# Altium PCB IOT_IO_v0.PcbDoc (part 3 of 3)
Units mil, origin at the board's own origin, x right, y up, seen from the top; angles counter-clockwise.
Board outline 8196.85 x 3393.7 mil, 2 copper layers (Top Layer, Top, Bottom Layer, Bottom); 364 components, 308 nets, 1129 pads, 291 vias.
Unrouted connection lines stored in the file: 7.
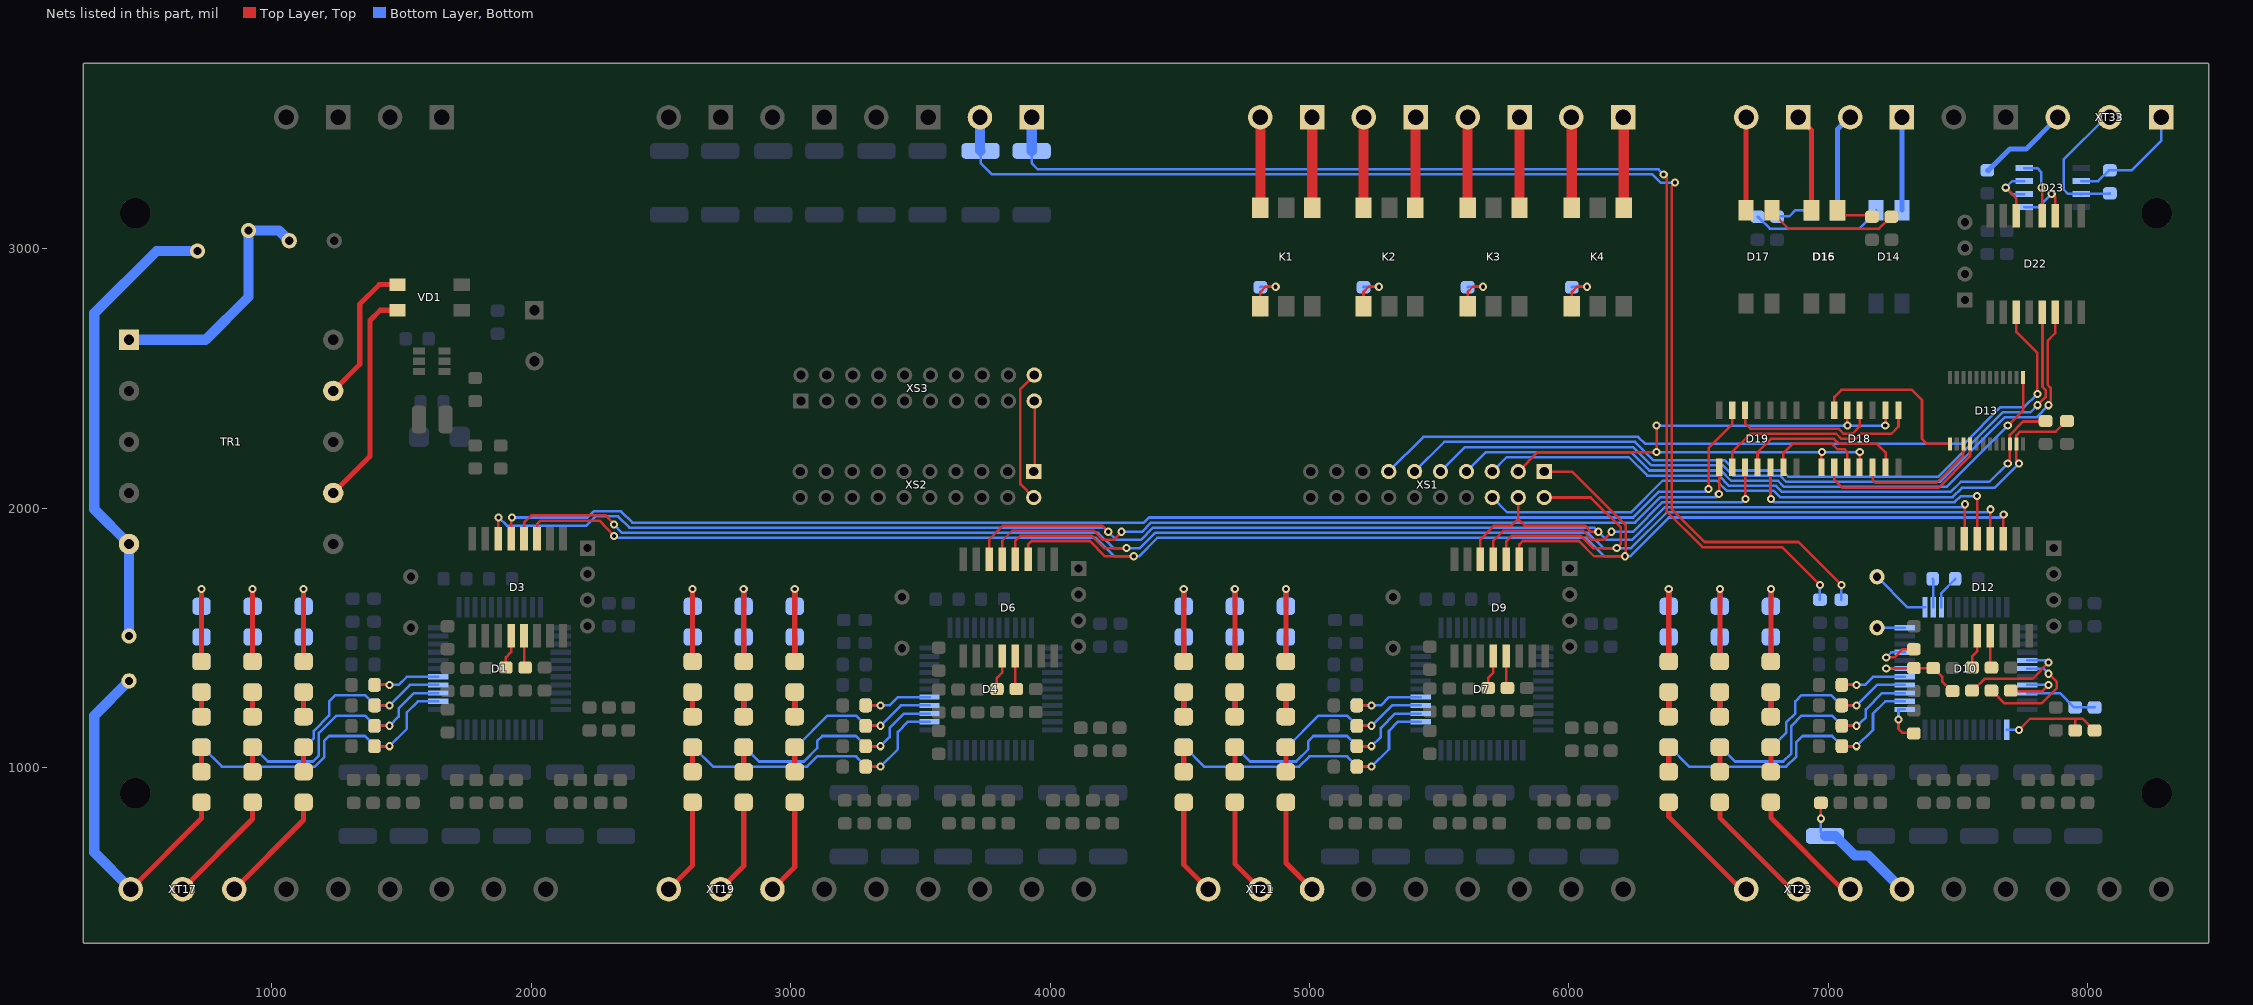
[diagram p3: the nets of this part, all layers, seen from the top]

## Via types
v1: diameter 31.5, hole 15.75, Top Layer, Top to Bottom Layer, Bottom, 291 vias

## Nets (pads, with @x,y where several pads share a name; then routed paths per layer and width w, separated by ;. In a path a pad name is that pad's centre, name@x,y a point inside that pad or via, vN(x,y) a via of type N, cw(c..) or ccw(c..) an arc to the next point about the centre after c; other vN are vias at no path point) (continued)
NET00082: R82.1 R90.2 XT15.1 | length 516.1
  Top Layer, Top w9.84: v1(6972.44,803.15) R90.2@6972.44,864.17
  Bottom Layer, Bottom w9.84: v1(6972.44,803.15) 6972.44,751.97 R82.1@6988.19,736.22
  Bottom Layer, Bottom w39.37: R82.1@6988.19,736.22 7027.56,736.22 7102.36,661.42 7155.12,661.42 XT15.1@7285.04,531.5
NET00083: BQ4.2 D10.22 | length 106.3
  Bottom Layer, Bottom w9.84: BQ4.2@7188.98,1539.37 D10.22@7295.28,1539.37
NET00084: D10.19 R94.1 | length 198.4
  Top Layer, Top w9.84: v1(7224.41,1425.2) 7255.91,1425.2 7287.4,1456.69 R94.1@7330.71,1456.69
  Bottom Layer, Bottom w9.84: v1(7224.41,1425.2) 7244.09,1444.88 D10.19@7295.28,1444.88
NET00085: BQ4.1 D10.23 | length 234
  Bottom Layer, Bottom w9.84: BQ4.1@7188.98,1736.22 7307.09,1618.11 D10.23@7374.02,1618.11
NET00086: D10.25 R99.2 | length 131.9
  Bottom Layer, Bottom w9.84: D10.25@7437.01,1618.11 7437.01,1673.23 7488.19,1724.41 R99.2@7490.16,1728.35
NET00087: D10.24 R100.2 | length 110.7
  Bottom Layer, Bottom w9.84: R100.2@7403.54,1728.35 7405.51,1724.41 D10.24@7405.51,1618.11
NET00088: D10.41 R96.2 | length 238.9
  Top Layer, Top w9.84: R96.2@7704.72,1297.24 7706.69,1295.28 7826.77,1295.28 v1(7850.39,1318.9)
  Bottom Layer, Bottom w9.84: D10.41@7767.72,1318.9 v1(7850.39,1318.9)
NET00089: D10.39 R97.2 | length 455.8
  Top Layer, Top w9.84: R97.2@7629.92,1297.24 7631.89,1295.28 7633.86,1295.28 7681.1,1248.03 7822.83,1248.03 7881.89,1307.09 7881.89,1330.71 v1(7850.39,1362.2)
  Bottom Layer, Bottom w9.84: D10.39@7767.72,1381.89 7830.71,1381.89 v1(7850.39,1362.2)
NET00090: D10.38 R98.2 | length 426.1
  Top Layer, Top w9.84: R98.2@7555.12,1297.24 7557.09,1299.21 7559.06,1299.21 7602.36,1342.52 7787.4,1342.52 v1(7850.39,1405.51)
  Bottom Layer, Bottom w9.84: D10.38@7767.72,1413.39 7842.52,1413.39 v1(7850.39,1405.51)
NET00091: C63.2 D10.12 | length 164.8
  Top Layer, Top w9.84: v1(7271.65,1185.04) 7271.65,1149.61 7287.4,1133.86 7328.74,1133.86 C63.2@7330.71,1131.89
  Bottom Layer, Bottom w9.84: v1(7271.65,1185.04) 7271.65,1224.41 D10.12@7295.28,1224.41
NET00092: R84.1 R92.2 XT16.1 | length 4701.6
  Top Layer, Top w9.84: v1(6366.14,3287.4) 6377.95,3275.59 6377.95,1988.19 6515.75,1850.39 6822.83,1850.39 v1(6968.5,1704.72)
  Bottom Layer, Bottom w9.84: R84.1@3929.13,3377.95 3929.13,3330.71 3952.76,3307.09 6346.46,3307.09 v1(6366.14,3287.4) ; R92.2@6968.5,1647.64 v1(6968.5,1704.72)
  Bottom Layer, Bottom w39.37: R84.1@3929.13,3377.95 3929.92,3378.74 XT16.1@3929.92,3507.87
NET00093: R85.1 R93.2 XT16.2 | length 4982.3
  Top Layer, Top w9.84: v1(6409.45,3255.91) 6397.64,3244.09 6397.64,1996.06 6523.62,1870.08 6885.83,1870.08 v1(7051.18,1704.72)
  Bottom Layer, Bottom w9.84: R85.1@3732.28,3377.95 3732.28,3330.71 3775.59,3287.4 6322.83,3287.4 6354.33,3255.91 v1(6409.45,3255.91) ; R93.2@7051.18,1647.64 v1(7051.18,1704.72)
  Bottom Layer, Bottom w39.37: XT16.2@3729.92,3507.87 3729.92,3380.32 R85.1@3732.28,3377.95
NET00094: C61.2 C62.2 D10.1 | length 420.6
  Top Layer, Top w9.84: v1(7736.22,1145.67) 7779.53,1188.98 7952.76,1188.98 ; C61.2@7952.76,1143.7 7952.76,1188.98 ; C62.2@8027.56,1143.7 8025.59,1145.67 8023.62,1145.67 7980.31,1188.98 7952.76,1188.98
  Bottom Layer, Bottom w9.84: D10.1@7688.98,1145.67 v1(7736.22,1145.67)
NET00095: C65.1 D10.42 R95.1 | length 282.7
  Bottom Layer, Bottom w9.84: D10.42@7767.72,1287.4 7893.7,1287.4 7948.82,1232.28 R95.1@7952.76,1232.28 C65.1@8027.56,1232.28
NET00096: C52.2 D10.17 R76.1 R77.2 | length 396.2
  Top Layer, Top w9.84: v1(7224.41,1381.89) 7214.57,1383.86 C52.2@7330.71,1383.86 7399.61,1383.86 7401.57,1381.89 R77.2@7405.51,1383.86 7407.48,1383.86 7440.94,1350.39 7440.94,1330.71 7476.38,1295.28 R76.1@7480.31,1295.28
  Bottom Layer, Bottom w9.84: v1(7224.41,1381.89) D10.17@7295.28,1381.89
NET00097: XS2.1 XS3.19 | length 273.6
  Top Layer, Top w9.84: XS2.1@3937.01,2141.73 3940.94,2145.67 3940.94,2409.45 XS3.19@3939.37,2413.39
NET00098: XS2.2 XS3.20 | length 515
  Top Layer, Top w9.84: XS2.2@3937.01,2041.73 3885.83,2092.91 3885.83,2459.84 XS3.20@3939.37,2513.39
NET00121: R101.2 R107.1 | length 94.5
  Top Layer, Top w19.68: R101.2@728.35,984.25 R107.1@728.35,1078.74
NET00122: R107.2 R113.1 | length 94.5
  Top Layer, Top w19.68: R107.2@728.35,1196.85 R113.1@728.35,1291.34
NET00123: R113.2 R119.2 | length 346.5
  Top Layer, Top w19.68: R113.2@728.35,1409.45 v1(728.35,1688.98)
  Bottom Layer, Bottom w19.68: R119.2@728.35,1622.05 v1(728.35,1688.98)
NET00124: R119.1 R125.2 | length 94.5
  Bottom Layer, Bottom w19.68: R125.2@728.35,1409.45 R119.1@728.35,1503.94
NET00125: R125.1 R131.2 | length 94.5
  Bottom Layer, Bottom w19.68: R131.2@728.35,1196.85 R125.1@728.35,1291.34
NET00128: R102.2 R108.1 | length 94.5
  Top Layer, Top w19.68: R102.2@925.2,984.25 R108.1@925.2,1078.74
NET00129: R108.2 R114.1 | length 94.5
  Top Layer, Top w19.68: R108.2@925.2,1196.85 R114.1@925.2,1291.34
NET00130: R114.2 R120.2 | length 346.5
  Top Layer, Top w19.68: R114.2@925.2,1409.45 v1(925.2,1688.98)
  Bottom Layer, Bottom w19.68: R120.2@925.2,1622.05 v1(925.2,1688.98)
NET00131: R120.1 R126.2 | length 94.5
  Bottom Layer, Bottom w19.68: R126.2@925.2,1409.45 R120.1@925.2,1503.94
NET00132: R126.1 R132.2 | length 94.5
  Bottom Layer, Bottom w19.68: R132.2@925.2,1196.85 R126.1@925.2,1291.34
NET00134: R103.2 R109.1 | length 94.5
  Top Layer, Top w19.68: R103.2@1122.05,984.25 R109.1@1122.05,1078.74
NET00135: R109.2 R115.1 | length 94.5
  Top Layer, Top w19.68: R109.2@1122.05,1196.85 R115.1@1122.05,1291.34
NET00136: R115.2 R121.2 | length 346.5
  Top Layer, Top w19.68: R115.2@1122.05,1409.45 v1(1122.05,1688.98)
  Bottom Layer, Bottom w19.68: R121.2@1122.05,1622.05 v1(1122.05,1688.98)
NET00137: R121.1 R127.2 | length 94.5
  Bottom Layer, Bottom w19.68: R127.2@1122.05,1409.45 R121.1@1122.05,1503.94
NET00138: R127.1 R133.2 | length 94.5
  Bottom Layer, Bottom w19.68: R133.2@1122.05,1196.85 R127.1@1122.05,1291.34
NET00140: R102.1 XT17.2 | length 446.5
  Top Layer, Top w19.68: XT17.2@655.12,531.5 925.2,801.57 R102.1@925.2,866.14
NET00142: R103.1 XT17.3 | length 445.2
  Top Layer, Top w19.68: XT17.3@855.12,531.5 1122.05,798.43 R103.1@1122.05,866.14
NET00143: R104.2 R110.1 | length 94.5
  Top Layer, Top w19.68: R104.2@2622.05,984.25 R110.1@2622.05,1078.74
NET00144: R110.2 R116.1 | length 94.5
  Top Layer, Top w19.68: R110.2@2622.05,1196.85 R116.1@2622.05,1291.34
NET00145: R116.2 R122.2 | length 346.5
  Top Layer, Top w19.68: R116.2@2622.05,1409.45 v1(2622.05,1688.98)
  Bottom Layer, Bottom w19.68: R122.2@2622.05,1622.05 v1(2622.05,1688.98)
NET00146: R122.1 R128.2 | length 94.5
  Bottom Layer, Bottom w19.68: R128.2@2622.05,1409.45 R122.1@2622.05,1503.94
NET00147: R128.1 R134.2 | length 94.5
  Bottom Layer, Bottom w19.68: R134.2@2622.05,1196.85 R128.1@2622.05,1291.34
NET00148: R105.2 R111.1 | length 94.5
  Top Layer, Top w19.68: R105.2@2818.9,984.25 R111.1@2818.9,1078.74
NET00150: R111.2 R117.1 | length 94.5
  Top Layer, Top w19.68: R111.2@2818.9,1196.85 R117.1@2818.9,1291.34
NET00151: R117.2 R123.2 | length 346.5
  Top Layer, Top w19.68: R117.2@2818.9,1409.45 v1(2818.9,1688.98)
  Bottom Layer, Bottom w19.68: R123.2@2818.9,1622.05 v1(2818.9,1688.98)
NET00152: R123.1 R129.2 | length 94.5
  Bottom Layer, Bottom w19.68: R129.2@2818.9,1409.45 R123.1@2818.9,1503.94
NET00153: R129.1 R135.2 | length 94.5
  Bottom Layer, Bottom w19.68: R135.2@2818.9,1196.85 R129.1@2818.9,1291.34
NET00155: R106.2 R112.1 | length 94.5
  Top Layer, Top w19.68: R106.2@3015.75,984.25 R112.1@3015.75,1078.74
NET00156: R112.2 R118.1 | length 94.5
  Top Layer, Top w19.68: R112.2@3015.75,1196.85 R118.1@3015.75,1291.34
NET00157: R118.2 R124.2 | length 346.5
  Top Layer, Top w19.68: R118.2@3015.75,1409.45 v1(3015.75,1688.98)
  Bottom Layer, Bottom w19.68: R124.2@3015.75,1622.05 v1(3015.75,1688.98)
NET00158: R124.1 R130.2 | length 94.5
  Bottom Layer, Bottom w19.68: R130.2@3015.75,1409.45 R124.1@3015.75,1503.94
NET00159: R130.1 R136.2 | length 94.5
  Bottom Layer, Bottom w19.68: R136.2@3015.75,1196.85 R130.1@3015.75,1291.34
NET00161: R105.1 XT19.2 | length 371.5
  Top Layer, Top w19.68: XT19.2@2729.92,531.5 2818.9,620.47 R105.1@2818.9,866.14
NET00162: R104.1 XT19.1 | length 372.8
  Top Layer, Top w19.68: XT19.1@2529.92,531.5 2622.05,623.62 R104.1@2622.05,866.14
NET00163: R106.1 XT19.3 | length 370.2
  Top Layer, Top w19.68: XT19.3@2929.92,531.5 3015.75,617.32 R106.1@3015.75,866.14
NET00176: R145.2 R151.1 | length 94.5
  Top Layer, Top w19.68: R145.2@4515.75,984.25 R151.1@4515.75,1078.74
NET00177: R151.2 R157.1 | length 94.5
  Top Layer, Top w19.68: R151.2@4515.75,1196.85 R157.1@4515.75,1291.34
NET00178: R157.2 R163.2 | length 346.5
  Top Layer, Top w19.68: R157.2@4515.75,1409.45 v1(4515.75,1688.98)
  Bottom Layer, Bottom w19.68: R163.2@4515.75,1622.05 v1(4515.75,1688.98)
NET00179: R163.1 R169.2 | length 94.5
  Bottom Layer, Bottom w19.68: R169.2@4515.75,1409.45 R163.1@4515.75,1503.94
NET00180: R169.1 R175.2 | length 94.5
  Bottom Layer, Bottom w19.68: R175.2@4515.75,1196.85 R169.1@4515.75,1291.34
NET00181: R146.2 R152.1 | length 94.5
  Top Layer, Top w19.68: R146.2@4712.6,984.25 R152.1@4712.6,1078.74
NET00182: R152.2 R158.1 | length 94.5
  Top Layer, Top w19.68: R152.2@4712.6,1196.85 R158.1@4712.6,1291.34
NET00183: R158.2 R164.2 | length 346.5
  Top Layer, Top w19.68: R158.2@4712.6,1409.45 v1(4712.6,1688.98)
  Bottom Layer, Bottom w19.68: R164.2@4712.6,1622.05 v1(4712.6,1688.98)
NET00184: R164.1 R170.2 | length 94.5
  Bottom Layer, Bottom w19.68: R170.2@4712.6,1409.45 R164.1@4712.6,1503.94
NET00185: R170.1 R176.2 | length 94.5
  Bottom Layer, Bottom w19.68: R176.2@4712.6,1196.85 R170.1@4712.6,1291.34
NET00186: R147.2 R153.1 | length 94.5
  Top Layer, Top w19.68: R147.2@4909.45,984.25 R153.1@4909.45,1078.74
NET00187: R153.2 R159.1 | length 94.5
  Top Layer, Top w19.68: R153.2@4909.45,1196.85 R159.1@4909.45,1291.34
NET00188: R159.2 R165.2 | length 346.5
  Top Layer, Top w19.68: R159.2@4909.45,1409.45 v1(4909.45,1688.98)
  Bottom Layer, Bottom w19.68: R165.2@4909.45,1622.05 v1(4909.45,1688.98)
NET00189: R165.1 R171.2 | length 94.5
  Bottom Layer, Bottom w19.68: R171.2@4909.45,1409.45 R165.1@4909.45,1503.94
NET00190: R171.1 R177.2 | length 94.5
  Bottom Layer, Bottom w19.68: R177.2@4909.45,1196.85 R171.1@4909.45,1291.34
NET00191: R146.1 XT21.2 | length 375.1
  Top Layer, Top w19.68: R146.1@4712.6,866.14 4712.6,629.13 XT21.2@4810.24,531.5
NET00192: R145.1 XT21.1 | length 373.8
  Top Layer, Top w19.68: R145.1@4515.75,866.14 4515.75,625.98 XT21.1@4610.24,531.5
NET00193: R147.1 XT21.3 | length 376.4
  Top Layer, Top w19.68: R147.1@4909.45,866.14 4909.45,632.28 XT21.3@5010.24,531.5
NET00198: R148.2 R154.1 | length 94.5
  Top Layer, Top w19.68: R148.2@6385.83,984.25 R154.1@6385.83,1078.74
NET00199: R154.2 R160.1 | length 94.5
  Top Layer, Top w19.68: R154.2@6385.83,1196.85 R160.1@6385.83,1291.34
NET00200: R160.2 R166.2 | length 346.5
  Top Layer, Top w19.68: R160.2@6385.83,1409.45 v1(6385.83,1688.98)
  Bottom Layer, Bottom w19.68: R166.2@6385.83,1622.05 v1(6385.83,1688.98)
NET00201: R166.1 R172.2 | length 94.5
  Bottom Layer, Bottom w19.68: R172.2@6385.83,1409.45 R166.1@6385.83,1503.94
NET00202: R172.1 R178.2 | length 94.5
  Bottom Layer, Bottom w19.68: R178.2@6385.83,1196.85 R172.1@6385.83,1291.34
NET00203: R149.2 R155.1 | length 94.5
  Top Layer, Top w19.68: R149.2@6582.68,984.25 R155.1@6582.68,1078.74
NET00204: R155.2 R161.1 | length 94.5
  Top Layer, Top w19.68: R155.2@6582.68,1196.85 R161.1@6582.68,1291.34
NET00205: R161.2 R167.2 | length 346.5
  Top Layer, Top w19.68: R161.2@6582.68,1409.45 v1(6582.68,1688.98)
  Bottom Layer, Bottom w19.68: R167.2@6582.68,1622.05 v1(6582.68,1688.98)
NET00206: R167.1 R173.2 | length 94.5
  Bottom Layer, Bottom w19.68: R173.2@6582.68,1409.45 R167.1@6582.68,1503.94
NET00207: R173.1 R179.2 | length 94.5
  Bottom Layer, Bottom w19.68: R179.2@6582.68,1196.85 R173.1@6582.68,1291.34
NET00208: R150.2 R156.1 | length 94.5
  Top Layer, Top w19.68: R150.2@6779.53,984.25 R156.1@6779.53,1078.74
NET00209: R156.2 R162.1 | length 94.5
  Top Layer, Top w19.68: R156.2@6779.53,1196.85 R162.1@6779.53,1291.34
NET00210: R162.2 R168.2 | length 346.5
  Top Layer, Top w19.68: R162.2@6779.53,1409.45 v1(6779.53,1688.98)
  Bottom Layer, Bottom w19.68: R168.2@6779.53,1622.05 v1(6779.53,1688.98)
NET00211: R168.1 R174.2 | length 94.5
  Bottom Layer, Bottom w19.68: R174.2@6779.53,1409.45 R168.1@6779.53,1503.94
NET00212: R174.1 R180.2 | length 94.5
  Bottom Layer, Bottom w19.68: R180.2@6779.53,1196.85 R174.1@6779.53,1291.34
NET00213: R149.1 XT23.2 | length 475.6
  Top Layer, Top w19.68: R149.1@6582.68,866.14 6582.68,807.09 6858.27,531.5 XT23.2@6885.04,531.5
NET00214: R148.1 XT23.1 | length 470.1
  Top Layer, Top w19.68: R148.1@6385.83,866.14 6385.83,811.02 6665.35,531.5 XT23.1@6685.04,531.5
NET00215: R150.1 XT23.3 | length 478.7
  Top Layer, Top w19.68: R150.1@6779.53,866.14 6779.53,807.09 7055.12,531.5 XT23.3@7085.04,531.5
NET00232: D22.14 D23.2 D23.3 | length 287.1
  Top Layer, Top w9.84: v1(7685.04,3236.22) 7725.98,3195.28 D22.14@7725.98,3128.54
  Bottom Layer, Bottom w9.84: D23.2@7755.91,3211.42 7709.84,3211.42 v1(7685.04,3236.22) 7710.24,3261.42 D23.3@7755.91,3261.42
NET00233: D22.12 D23.4 | length 241.7
  Top Layer, Top w9.84: v1(7822.83,3236.22) 7825.98,3233.07 D22.12@7825.98,3128.54
  Bottom Layer, Bottom w9.84: D23.4@7755.91,3311.42 7806.69,3311.42 7822.83,3295.28 v1(7822.83,3236.22)
NET00234: D22.11 D23.1 | length 217.3
  Top Layer, Top w9.84: v1(7862.2,3212.6) 7875.98,3198.82 D22.11@7875.98,3128.54
  Bottom Layer, Bottom w9.84: D23.1@7755.91,3161.42 7811.02,3161.42 v1(7862.2,3212.6)
NET00237: R201.1 XT33.3 | length 355.9
  Bottom Layer, Bottom w19.68: R201.1@7614.17,3303.15 7618.11,3303.15 7700.79,3385.83 7763.78,3385.83 7874.02,3496.06 XT33.3@7885.04,3507.87
NET00238: D23.6 R202.1 XT33.1 | length 463.7
  Bottom Layer, Bottom w9.84: D23.6@7975.59,3261.42 8040.94,3261.42 8082.68,3303.15 R202.1@8086.61,3303.15 8169.29,3303.15 8285.04,3418.9 XT33.1@8285.04,3507.87
NET00239: D23.7 R202.2 XT33.2 | length 546.7
  Bottom Layer, Bottom w9.84: D23.7@7975.59,3211.42 D23.7@7976.77,3212.6 ; XT33.2@8085.04,3507.87 8070.87,3507.87 7909.45,3346.46 7909.45,3228.35 7925.2,3212.6 D23.7@7976.77,3212.6 ; R202.2@8086.61,3214.57 8084.65,3212.6 D23.7@7976.77,3212.6
NET00241: D13.16 D18.9 | length 682.3
  Top Layer, Top w9.84: D18.9@7024.02,2158.27 7024.02,2109.84 7055.12,2078.74 7425.2,2078.74 7547.24,2200.79 D13.16@7547.24,2248.03
NET00242: D13.15 D18.12 | length 492.8
  Top Layer, Top w9.84: D18.12@7171.65,2158.27 7171.65,2107.87 7181.1,2098.43 7417.32,2098.43 7521.65,2202.76 D13.15@7521.65,2248.03
NET00244: D13.13 D18.6 | length 683.4
  Top Layer, Top w9.84: D18.6@7024.02,2377.95 7024.02,2429.53 7051.18,2456.69 7322.83,2456.69 7362.2,2417.32 7362.2,2267.72 7381.89,2248.03 D13.13@7470.47,2248.03
NET00246: D18.4 D19.5 | length 583
  Top Layer, Top w9.84: D19.5@6680.31,2377.95 6680.31,2327.56 6700.79,2307.09 7039.37,2307.09 7059.06,2287.4 7094.49,2287.4 7121.65,2314.57 D18.4@7121.65,2377.95
NET00247: D18.1 D19.9 | length 819.9
  Top Layer, Top w9.84: D19.9@6630.31,2158.27 6630.31,2216.93 6700.79,2287.4 7031.5,2287.4 7051.18,2267.72 7106.3,2267.72 7125.98,2287.4 7244.09,2287.4 7271.65,2314.96 D18.1@7271.65,2377.95
NET00248: D18.13 D19.11 | length 651.7
  Top Layer, Top w9.84: D19.11@6727.95,2158.27 6727.95,2216.14 6779.53,2267.72 7023.62,2267.72 7043.31,2248.03 7188.98,2248.03 7221.65,2215.35 D18.13@7221.65,2158.27
NET00249: D18.10 D19.13 | length 387.5
  Top Layer, Top w9.84: D19.13@6827.95,2158.27 6827.95,2213.78 6862.2,2248.03 7015.75,2248.03 7035.43,2228.35 7062.99,2228.35 7074.02,2217.32 D18.10@7074.02,2158.27
NET00250: K3.4 XT31.1 | length 349.5
  Top Layer, Top w39.37: K3.4@5810.24,3159.53 5810.24,3507.09 5811.02,3507.87 XT31.1@5810.24,3507.87
NET00251: K3.6 XT31.2 | length 348.3
  Top Layer, Top w39.37: K3.6@5610.24,3159.53 XT31.2@5610.24,3507.87
NET00252: K4.4 XT32.1 | length 351
  Top Layer, Top w39.37: XT32.1@6210.24,3507.87 6212.6,3507.87 6211.81,3507.09 K4.4@6211.81,3159.53
NET00253: K4.6 XT32.2 | length 348.6
  Top Layer, Top w39.37: XT32.2@6010.24,3507.87 6011.81,3503.94 K4.6@6011.81,3159.53
NET00254: K3.1 R199.2 | length 182.2
  Top Layer, Top w9.84: K3.1@5610.24,2779.53 5610.24,2834.65 5629.92,2854.33 v1(5669.29,2854.33)
  Bottom Layer, Bottom w9.84: R199.2@5610.24,2852.36 5612.2,2854.33 v1(5669.29,2854.33)
NET00255: K4.1 R200.2 | length 182.2
  Top Layer, Top w9.84: K4.1@6011.81,2779.53 6011.81,2834.65 6031.5,2854.33 v1(6070.87,2854.33)
  Bottom Layer, Bottom w9.84: R200.2@6011.81,2852.36 6013.78,2854.33 v1(6070.87,2854.33)
NET00256: K1.4 XT29.1 | length 349
  Top Layer, Top w39.37: XT29.1@5010.24,3507.87 5011.81,3503.94 5011.02,3503.15 K1.4@5011.02,3159.53
NET00257: K1.6 XT29.2 | length 349.1
  Top Layer, Top w39.37: XT29.2@4810.24,3507.87 4811.02,3507.87 K1.6@4811.02,3159.53
NET00258: K2.4 XT30.1 | length 349.5
  Top Layer, Top w39.37: K2.4@5408.66,3159.53 5408.66,3507.09 5409.45,3507.87 XT30.1@5410.24,3507.87
NET00259: K2.6 XT30.2 | length 349.9
  Top Layer, Top w39.37: K2.6@5208.66,3159.53 5208.66,3507.87 XT30.2@5210.24,3507.87
NET00260: K1.1 R197.2 | length 182.2
  Top Layer, Top w9.84: K1.1@4811.02,2779.53 4811.02,2834.65 4830.71,2854.33 v1(4870.08,2854.33)
  Bottom Layer, Bottom w9.84: R197.2@4811.02,2852.36 4812.99,2854.33 v1(4870.08,2854.33)
NET00261: K2.1 R198.2 | length 182.2
  Top Layer, Top w9.84: K2.1@5208.66,2779.53 5208.66,2834.65 5228.35,2854.33 v1(5267.72,2854.33)
  Bottom Layer, Bottom w9.84: R198.2@5208.66,2852.36 5210.63,2854.33 v1(5267.72,2854.33)
NET00262: TR1.9 VD1.3 | length 553.7
  Top Layer, Top w19.68: TR1.9@1236.22,2452.76 1338.58,2555.12 1338.58,2787.4 1413.39,2862.2 VD1.3@1484.25,2862.2
NET00263: TR1.7 VD1.4 | length 846.7
  Top Layer, Top w19.68: TR1.7@1236.22,2059.06 1377.95,2200.79 1377.95,2724.41 1417.32,2763.78 VD1.4@1484.25,2763.78
NET00267: FU2.2 TR1.5 VS1.2 | length 1796.7
  Bottom Layer, Bottom w39.37: FU2.2@448.82,1507.87 TR1.5@448.82,1862.2 314.96,1996.06 314.96,2751.97 555.12,2992.13 VS1.2@712.6,2992.13
NET00269: D14.2 XT26.1 | length 359.2
  Bottom Layer, Bottom w19.68: D14.2@7285.04,3149.61 7285.04,3502.36 7283.46,3503.94 XT26.1@7285.04,3507.87
NET00270: D14.1 R190.2 | length 509.4
  Bottom Layer, Bottom w9.84: R190.2@6728.35,3124.02 6730.31,3122.05 6732.28,3122.05 6775.59,3078.74 7122.05,3078.74 7185.04,3141.73 D14.1@7185.04,3149.61
NET00272: D15.1 R191.2 | length 144.5
  Bottom Layer, Bottom w9.84: R191.2@6803.15,3124.02 6805.12,3125.98 6850.39,3125.98 6874.02,3149.61 D15.1@6937.01,3149.61
NET00273: D15.2 XT26.2 | length 378.9
  Bottom Layer, Bottom w19.68: D15.2@7037.01,3149.61 7037.01,3462.2 7070.87,3496.06 XT26.2@7085.04,3507.87
NET00275: D16.1 R192.2 | length 156
  Top Layer, Top w9.84: D16.1@7035.43,3149.61 7035.43,3129.92 7163.39,3129.92 R192.2@7169.29,3124.02
NET00276: D17.1 R193.2 | length 513.3
  Top Layer, Top w9.84: D17.1@6783.46,3149.61 6783.46,3141.73 6846.46,3078.74 7196.85,3078.74 7240.16,3122.05 7242.13,3122.05 R193.2@7244.09,3124.02
NET00277: D16.2 XT27.1 | length 379.4
  Top Layer, Top w19.68: XT27.1@6885.04,3507.87 6893.7,3500 6935.43,3458.27 D16.2@6935.43,3149.61
NET00278: D17.2 XT27.2 | length 358.9
  Top Layer, Top w19.68: D17.2@6683.46,3149.61 6683.46,3506.3 XT27.2@6685.04,3507.87
NPOWER: FU1.2 TR1.1 VS1.1 | length 958.8
  Bottom Layer, Bottom w39.37: TR1.1@448.82,2649.61 744.09,2649.61 909.45,2814.96 VS1.1@909.45,3070.87 1027.56,3070.87 FU1.2@1066.93,3031.5
SCL1: D13.22 R189.2 XS1.5 | length 2384.3
  Top Layer, Top w9.84: v1(7692.91,2173.23) 7700.79,2181.1 D13.22@7700.79,2248.03 7700.79,2283.46 7751.97,2334.65 7834.65,2334.65 R189.2@7838.58,2336.61
  Bottom Layer, Bottom w9.84: XS1.5@5705.51,2141.73 5760.63,2196.85 6232.28,2196.85 6303.15,2125.98 6578.74,2125.98 6618.11,2086.61 6799.21,2086.61 6822.83,2062.99 7472.44,2062.99 7511.81,2102.36 7622.05,2102.36 v1(7692.91,2173.23)
SDA1: D13.23 R194.2 XS1.6 | length 2515
  Top Layer, Top w9.84: v1(7736.22,2173.23) 7726.38,2183.07 7726.38,2281.5 7740.16,2295.28 7877.95,2295.28 7917.32,2334.65 7919.29,2334.65 R194.2@7921.26,2336.61
  Bottom Layer, Bottom w9.84: XS1.6@5705.51,2041.73 5762.99,1984.25 6240.16,1984.25 6362.2,2106.3 6570.87,2106.3 6610.24,2066.93 6791.34,2066.93 6814.96,2043.31 7480.31,2043.31 7515.75,2078.74 7641.73,2078.74 v1(7736.22,2173.23)
SPCK_1: D3.13 R22.1 | length 125.2
  Top Layer, Top w9.84: D3.13@1972.05,1509.25 1972.05,1390.16 R22.1@1976.38,1385.83
SPCK_2: D6.13 R47.1 | length 129.2
  Top Layer, Top w9.84: D6.13@3865.75,1430.51 3865.75,1307.48 R47.1@3870.08,1303.15
SPCK_3: D9.13 R72.1 | length 125.2
  Top Layer, Top w9.84: D9.13@5759.45,1430.51 5759.45,1311.42 R72.1@5763.78,1307.09
SPCK_4: D12.13 R97.1 | length 125.2
  Top Layer, Top w9.84: D12.13@7625.59,1509.25 7625.59,1390.16 R97.1@7629.92,1385.83
SPCS_1: D3.12 R23.1 | length 131.9
  Top Layer, Top w9.84: R23.1@1901.57,1385.83 1901.57,1425.2 1922.05,1445.67 D3.12@1922.05,1509.25
SPCS_2: D6.12 R48.1 | length 135.8
  Top Layer, Top w9.84: R48.1@3795.28,1303.15 3795.28,1346.46 3815.75,1366.93 D6.12@3815.75,1430.51
SPCS_3: D9.12 R73.1 | length 131.9
  Top Layer, Top w9.84: R73.1@5688.98,1307.09 5688.98,1346.46 5709.45,1366.93 D9.12@5709.45,1430.51
SPCS_4: D12.12 R98.1 | length 131.9
  Top Layer, Top w9.84: R98.1@7555.12,1385.83 7555.12,1429.13 7575.59,1449.61 D12.12@7575.59,1509.25
SPI1_CS: D18.2 D18.5 D18.8 D18.11 XS1.3 | length 2568.4
  Top Layer, Top w9.84: XS1.3@5805.51,2141.73 5880.31,2216.54 v1(6338.58,2216.54) v1(6338.58,2318.9) ; D18.8@6974.02,2158.27 6974.02,2214.17 v1(6976.38,2216.54) ; D18.5@7074.02,2377.95 7074.02,2319.68 v1(7074.8,2318.9) ; D18.11@7121.65,2158.27 7121.65,2216.14 v1(7122.05,2216.54) ; v1(7220.47,2318.9) 7221.65,2320.08 D18.2@7221.65,2377.95
  Bottom Layer, Bottom w9.84: v1(6338.58,2216.54) v1(6976.38,2216.54) v1(7122.05,2216.54) ; v1(6338.58,2318.9) v1(7074.8,2318.9) v1(7220.47,2318.9)
SPI1_CS1: D3.5 D19.6 | length 5120.5
  Top Layer, Top w9.84: D3.5@1922.05,1881.89 1922.05,1961.42 v1(1925.2,1964.57) ; v1(6539.37,2074.8) 6539.37,2232.28 6630.31,2323.23 D19.6@6630.31,2377.95
  Bottom Layer, Bottom w9.84: v1(1925.2,1964.57) 2216.54,1964.57 2240.16,1988.19 2346.46,1988.19 2389.76,1944.88 4362.2,1944.88 4381.89,1964.57 6248.03,1964.57 6346.46,2062.99 6527.56,2062.99 v1(6539.37,2074.8)
SPI1_CS2: D6.5 D19.8 | length 3042.5
  Top Layer, Top w9.84: D6.5@3815.75,1803.15 3815.75,1874.8 3854.33,1913.39 4169.29,1913.39 4204.72,1877.95 4244.09,1877.95 v1(4275.59,1909.45) ; v1(6578.74,2055.12) 6580.31,2056.69 D19.8@6580.31,2158.27
  Bottom Layer, Bottom w9.84: v1(4275.59,1909.45) 4354.33,1909.45 4389.76,1944.88 6255.91,1944.88 6354.33,2043.31 6566.93,2043.31 v1(6578.74,2055.12)
SPI1_CS3: D9.5 D19.10 | length 1262.4
  Top Layer, Top w9.84: D9.5@5709.45,1803.15 5709.45,1874.8 5748.03,1913.39 6055.12,1913.39 6090.55,1877.95 6133.86,1877.95 v1(6165.35,1909.45) ; D19.10@6680.31,2158.27 6680.31,2036.22 v1(6681.1,2035.43)
  Bottom Layer, Bottom w9.84: v1(6165.35,1909.45) 6248.03,1909.45 6362.2,2023.62 6669.29,2023.62 v1(6681.1,2035.43)
SPI1_CS4: D12.5 D19.12 | length 1099.1
  Top Layer, Top w9.84: D19.12@6777.95,2158.27 6777.95,2037.01 v1(6779.53,2035.43) ; v1(7574.8,2047.24) 7575.59,2046.46 D12.5@7575.59,1881.89
  Bottom Layer, Bottom w9.84: v1(6779.53,2035.43) 6791.34,2023.62 7488.19,2023.62 7511.81,2047.24 v1(7574.8,2047.24)
SPI1_MISO: D3.6 D6.6 D9.6 D12.6 XS1.4 | length 7267.6
  Top Layer, Top w9.84: D3.6@1872.05,1881.89 1872.05,1962.6 v1(1874.02,1964.57) ; D6.6@3765.75,1803.15 3765.75,1879.92 3818.9,1933.07 4200.79,1933.07 v1(4224.41,1909.45) ; D9.6@5659.45,1803.15 5659.45,1879.92 5712.6,1933.07 5779.53,1933.07 5805.12,1958.66 5830.71,1933.07 6062.99,1933.07 6086.61,1909.45 v1(6114.17,1909.45) ; 5805.51,1959.06 XS1.4@5805.51,2041.73 ; D12.6@7525.59,1881.89 7527.56,1883.86 v1(7527.56,2015.75)
  Bottom Layer, Bottom w9.84: v1(1874.02,1964.57) 1905.51,1933.07 2212.6,1933.07 2248.03,1968.5 2334.65,1968.5 2377.95,1925.2 4208.66,1925.2 v1(4224.41,1909.45) 4255.91,1877.95 4350.39,1877.95 4397.64,1925.2 6098.43,1925.2 v1(6114.17,1909.45) 6145.67,1877.95 6244.09,1877.95 6370.08,2003.94 7515.75,2003.94 v1(7527.56,2015.75)
SPI1_MOSI: D3.3 D6.3 D9.3 D12.3 XS1.1 | length 7507.4
  Top Layer, Top w9.84: D3.3@2022.05,1881.89 2022.05,1939.37 2035.43,1952.76 2263.78,1952.76 v1(2318.9,1893.7) ; D6.3@3915.75,1803.15 3915.75,1860.63 3929.13,1874.02 4153.54,1874.02 4212.6,1814.96 v1(4322.83,1814.96) ; D9.3@5809.45,1803.15 5809.45,1860.63 5822.83,1874.02 6039.37,1874.02 6098.43,1814.96 v1(6216.54,1814.96) 6220.47,1818.9 6220.47,1933.07 6011.81,2141.73 XS1.1@5905.51,2141.73 ; D12.3@7675.59,1881.89 7675.59,1974.8 v1(7677.17,1976.38)
  Bottom Layer, Bottom w9.84: v1(2318.9,1893.7) 2326.77,1885.83 4177.17,1885.83 4248.03,1814.96 v1(4322.83,1814.96) 4342.52,1814.96 4413.39,1885.83 6066.93,1885.83 6137.8,1814.96 v1(6216.54,1814.96) 6236.22,1814.96 6385.83,1964.57 7665.35,1964.57 v1(7677.17,1976.38)
SPI1_SCK: D3.4 D6.4 D9.4 D12.4 XS1.2 | length 7487.4
  Top Layer, Top w9.84: D3.4@1972.05,1881.89 1972.05,1944.49 2000,1972.44 2287.4,1972.44 v1(2318.9,1937.01) ; D6.4@3865.75,1803.15 3865.75,1873.62 3885.83,1893.7 4161.42,1893.7 4208.66,1846.46 v1(4295.28,1846.46) ; D9.4@5759.45,1803.15 5759.45,1873.62 5779.53,1893.7 6047.24,1893.7 6094.49,1846.46 v1(6185.04,1846.46) 6200.79,1862.2 6200.79,1925.2 6084.25,2041.73 XS1.2@5905.51,2041.73 ; D12.4@7625.59,1881.89 7625.59,1995.67 v1(7625.98,1996.06)
  Bottom Layer, Bottom w9.84: v1(2318.9,1937.01) 2350.39,1905.51 4185.04,1905.51 4244.09,1846.46 v1(4295.28,1846.46) 4346.46,1846.46 4405.51,1905.51 6074.8,1905.51 6133.86,1846.46 v1(6185.04,1846.46) 6240.16,1846.46 6377.95,1984.25 7614.17,1984.25 v1(7625.98,1996.06)
UAP_1: C69.2 D1.13 R131.1 R137.2 | length 1213
  Top Layer, Top w9.84: C69.2@1395.67,1082.68 v1(1452.76,1082.68)
  Bottom Layer, Bottom w9.84: R131.1@728.35,1078.74 732.28,1078.74 807.09,1003.94 1165.35,1003.94 1200.79,1039.37 1200.79,1102.36 1220.47,1122.05 1358.27,1122.05 1393.7,1086.61 R137.2@1395.67,1082.68 v1(1452.76,1082.68) 1519.68,1149.61 1519.68,1212.6 1562.99,1255.91 D1.13@1641.73,1255.91
UAP_2: C73.2 D4.13 R134.1 R141.2 | length 1145.7
  Top Layer, Top w9.84: C73.2@3289.37,1003.94 v1(3346.46,1003.94)
  Bottom Layer, Bottom w9.84: R134.1@2622.05,1078.74 2625.98,1078.74 2700.79,1003.94 3062.99,1003.94 3102.36,1043.31 3251.97,1043.31 3283.46,1011.81 R141.2@3289.37,1003.94 v1(3346.46,1003.94) 3413.39,1070.87 3413.39,1137.8 3452.76,1177.17 D4.13@3535.43,1177.17
UAP_3: C77.2 D7.13 R175.1 R181.2 | length 1148.1
  Top Layer, Top w9.84: C77.2@5183.07,1003.94 v1(5240.16,1003.94)
  Bottom Layer, Bottom w9.84: R175.1@4515.75,1078.74 4519.69,1078.74 4594.49,1003.94 4960.63,1003.94 5000,1043.31 5145.67,1043.31 5181.1,1007.87 R181.2@5183.07,1003.94 v1(5240.16,1003.94) 5307.09,1070.87 5307.09,1141.73 5342.52,1177.17 D7.13@5429.13,1177.17
UAP_4: C81.2 D10.13 R178.1 R185.2 | length 1204.5
  Top Layer, Top w9.84: C81.2@7053.15,1082.68 v1(7110.24,1082.68)
  Bottom Layer, Bottom w9.84: R178.1@6385.83,1078.74 6389.76,1078.74 6464.57,1003.94 6838.58,1003.94 6877.95,1043.31 6877.95,1098.43 6901.57,1122.05 7015.75,1122.05 7051.18,1086.61 R185.2@7053.15,1082.68 v1(7110.24,1082.68) 7173.23,1145.67 7173.23,1208.66 7220.47,1255.91 D10.13@7295.28,1255.91
UART3_DO: D22.3 XS1.13 | length 2996.5
  Top Layer, Top w9.84: D22.3@7725.98,2755.91 7725.98,2679.53 7807.09,2598.43 v1(7807.09,2440.94)
  Bottom Layer, Bottom w9.84: XS1.13@5305.91,2141.73 5439.76,2275.59 6267.72,2275.59 6295.28,2248.03 7523.62,2248.03 7665.35,2389.76 7755.91,2389.76 v1(7807.09,2440.94)
UART3_RX: D22.6 XS1.9 | length 2940.4
  Top Layer, Top w9.84: v1(7850.39,2397.64) 7858.27,2405.51 7858.27,2464.57 7846.46,2476.38 7846.46,2645.67 7875.98,2675.2 D22.6@7875.98,2755.91
  Bottom Layer, Bottom w9.84: XS1.9@5505.51,2141.73 5600,2236.22 6248.03,2236.22 6318.9,2165.35 6594.49,2165.35 6633.86,2125.98 6814.96,2125.98 6838.58,2102.36 7433.07,2102.36 7681.1,2350.39 7803.15,2350.39 v1(7850.39,2397.64)
UART3_TX: D22.5 XS1.11 | length 2994.6
  Top Layer, Top w9.84: v1(7807.09,2397.64) 7838.58,2429.13 7838.58,2456.69 7826.77,2468.5 7826.77,2755.12 D22.5@7825.98,2755.91
  Bottom Layer, Bottom w9.84: XS1.11@5405.91,2141.73 5520.08,2255.91 6255.91,2255.91 6326.77,2185.04 6602.36,2185.04 6641.73,2145.67 6822.83,2145.67 6846.46,2122.05 7425.2,2122.05 7673.23,2370.08 7779.53,2370.08 v1(7807.09,2397.64)
UBP_1: C70.2 D1.14 R132.1 R138.2 | length 1008.3
  Top Layer, Top w9.84: C70.2@1395.67,1161.42 v1(1452.76,1161.42)
  Bottom Layer, Bottom w9.84: R132.1@925.2,1078.74 929.13,1078.74 984.25,1023.62 1157.48,1023.62 1181.1,1047.24 1181.1,1133.86 1248.03,1200.79 1358.27,1200.79 1393.7,1165.35 R138.2@1395.67,1161.42 v1(1452.76,1161.42) 1488.19,1196.85 1488.19,1228.35 1547.24,1287.4 D1.14@1641.73,1287.4
UBP_2: C74.2 D4.14 R135.1 R142.2 | length 943.4
  Top Layer, Top w9.84: C74.2@3289.37,1082.68 v1(3346.46,1082.68)
  Bottom Layer, Bottom w9.84: R135.1@2818.9,1078.74 2822.83,1078.74 2877.95,1023.62 3051.18,1023.62 3102.36,1074.8 3102.36,1102.36 3122.05,1122.05 3251.97,1122.05 3287.4,1086.61 R142.2@3289.37,1082.68 v1(3346.46,1082.68) 3381.89,1118.11 3381.89,1153.54 3437.01,1208.66 D4.14@3535.43,1208.66
UBP_3: C78.2 D7.14 R176.1 R182.2 | length 945.7
  Top Layer, Top w9.84: C78.2@5183.07,1082.68 v1(5240.16,1082.68)
  Bottom Layer, Bottom w9.84: R176.1@4712.6,1078.74 4716.54,1078.74 4771.65,1023.62 4948.82,1023.62 4996.06,1070.87 4996.06,1102.36 5015.75,1122.05 5145.67,1122.05 5181.1,1086.61 R182.2@5183.07,1082.68 v1(5240.16,1082.68) 5275.59,1118.11 5275.59,1153.54 5330.71,1208.66 D7.14@5429.13,1208.66
UBP_4: C82.2 D10.14 R179.1 R186.2 | length 1014.8
  Top Layer, Top w9.84: C82.2@7053.15,1161.42 v1(7110.24,1161.42)
  Bottom Layer, Bottom w9.84: R179.1@6582.68,1078.74 6586.61,1078.74 6641.73,1023.62 6826.77,1023.62 6858.27,1055.12 6858.27,1161.42 6897.64,1200.79 7015.75,1200.79 7051.18,1165.35 R186.2@7053.15,1161.42 v1(7110.24,1161.42) 7145.67,1192.91 7145.67,1224.41 7208.66,1287.4 D10.14@7295.28,1287.4
UCP_1: C71.2 D1.15 R133.1 R139.2 | length 758.1
  Top Layer, Top w9.84: C71.2@1395.67,1240.16 v1(1452.76,1240.16)
  Bottom Layer, Bottom w9.84: R133.1@1122.05,1078.74 1125.98,1078.74 1161.42,1114.17 1161.42,1141.73 1220.47,1200.79 1220.47,1255.91 1244.09,1279.53 1358.27,1279.53 1393.7,1244.09 R139.2@1395.67,1240.16 v1(1452.76,1240.16) 1531.5,1318.9 D1.15@1641.73,1318.9
UCP_2: C75.2 D4.15 R136.1 R143.2 | length 677.1
  Top Layer, Top w9.84: C75.2@3289.37,1161.42 v1(3346.46,1161.42)
  Bottom Layer, Bottom w9.84: R136.1@3015.75,1078.74 3019.68,1078.74 3141.73,1200.79 3251.97,1200.79 3287.4,1165.35 R143.2@3289.37,1161.42 v1(3346.46,1161.42) 3425.2,1240.16 D4.15@3535.43,1240.16
UCP_3: C79.2 D7.15 R177.1 R183.2 | length 677.1
  Top Layer, Top w9.84: C79.2@5183.07,1161.42 v1(5240.16,1161.42)
  Bottom Layer, Bottom w9.84: R177.1@4909.45,1078.74 4913.39,1078.74 5035.43,1200.79 5145.67,1200.79 5181.1,1165.35 R183.2@5183.07,1161.42 v1(5240.16,1161.42) 5318.9,1240.16 D7.15@5429.13,1240.16
UCP_4: C83.2 D10.15 R180.1 R187.2 | length 755.7
  Top Layer, Top w9.84: C83.2@7053.15,1240.16 v1(7110.24,1240.16)
  Bottom Layer, Bottom w9.84: R180.1@6779.53,1078.74 6783.46,1078.74 6838.58,1133.86 6838.58,1173.23 6874.02,1208.66 6874.02,1255.91 6897.64,1279.53 7011.81,1279.53 7051.18,1240.16 R187.2@7053.15,1240.16 v1(7110.24,1240.16) 7188.98,1318.9 D10.15@7295.28,1318.9
UN_1: C72.2 D1.16 R140.2 | length 316.2
  Top Layer, Top w9.84: C72.2@1395.67,1318.9 v1(1452.76,1318.9)
  Bottom Layer, Bottom w9.84: R140.2@1395.67,1318.9 v1(1452.76,1318.9) 1488.19,1318.9 1519.68,1350.39 D1.16@1641.73,1350.39
UN_2: C76.2 D4.16 R144.2 | length 316.2
  Top Layer, Top w9.84: C76.2@3289.37,1240.16 v1(3346.46,1240.16)
  Bottom Layer, Bottom w9.84: R144.2@3289.37,1240.16 v1(3346.46,1240.16) 3381.89,1240.16 3413.39,1271.65 D4.16@3535.43,1271.65
UN_3: C80.2 D7.16 R184.2 | length 316.2
  Top Layer, Top w9.84: C80.2@5183.07,1240.16 v1(5240.16,1240.16)
  Bottom Layer, Bottom w9.84: R184.2@5183.07,1240.16 v1(5240.16,1240.16) 5275.59,1240.16 5307.09,1271.65 D7.16@5429.13,1271.65
UN_4: C84.2 D10.16 R188.2 | length 312.3
  Top Layer, Top w9.84: C84.2@7053.15,1318.9 v1(7110.24,1318.9)
  Bottom Layer, Bottom w9.84: R188.2@7053.15,1318.9 v1(7110.24,1318.9) 7141.73,1318.9 7173.23,1350.39 D10.16@7295.28,1350.39
UPOWER: FU2.1 R101.1 XT17.1 | length 1366.7
  Top Layer, Top w19.68: XT17.1@455.12,531.5 728.35,804.72 R101.1@728.35,866.14
  Bottom Layer, Bottom w39.37: FU2.1@448.82,1334.65 314.96,1200.79 314.96,673.23 455.91,532.28 456.69,531.5 XT17.1@455.12,531.5
~INT: D13.1 XS1.7 | length 2481.2
  Top Layer, Top w9.84: v1(7692.91,2318.9) 7751.97,2377.95 D13.1@7751.97,2503.94
  Bottom Layer, Bottom w9.84: XS1.7@5605.51,2141.73 5680.31,2216.54 6240.16,2216.54 6311.02,2145.67 6586.61,2145.67 6625.98,2106.3 6807.09,2106.3 6830.71,2082.68 7456.69,2082.68 v1(7692.91,2318.9)
pads on no net: D1.26 D1.27 D1.28 D1.29 D1.30 D1.31 D1.32 D1.33 D1.34 D1.35 D1.36 D1.37 D3.7 D3.10 D4.26 D4.27 D4.28 D4.29 D4.30 D4.31 D4.32 D4.33 D4.34 D4.35 D4.36 D4.37 D6.7 D6.10 D7.26 D7.27 D7.28 D7.29 D7.30 D7.31 D7.32 D7.33 D7.34 D7.35 D7.36 D7.37 D9.7 D9.10 D10.26 D10.27 D10.28 D10.29 D10.30 D10.31 D10.32 D10.33 D10.34 D10.35 D10.36 D10.37 D12.7 D12.10 D13.8 D13.9 D13.10 D13.11 D19.2 D19.4 D22.7 D22.10 D22.13 K1.3 K1.5 K2.3 K2.5 K3.3 K3.5 K4.3 K4.5 TR1.2 TR1.3 TR1.4 TR1.6 TR1.8 TR1.10 XS1.8 XS1.10 XS1.12 XS1.16 XS1.17 XS1.19 XS1.20

## Polygon pours and split planes (outlines as drawn)
+5V on Top Layer, Top (solid, pour order 2): 1669.29,2421.26 1669.29,2236.22 2283.46,2236.22 2283.46,2421.26
NET00048 on Top Layer, Top (solid, pour order 0): 1566.93,2527.56 1456.69,2527.56 1456.69,2236.22 1566.93,2236.22
GND on Bottom Layer, Bottom (solid, remove dead copper, pour order 16): 1358.27,2775.59 1358.27,2145.67 1629.92,1874.02 2059.06,1874.02 2098.43,1834.65 6137.8,1834.65 6255.91,1834.65 6385.83,1964.57 7704.72,1929.13 7791.34,1846.46 8082.68,1846.46 8082.68,2807.09 7460.63,2807.09 7366.14,2712.6 6889.76,2712.6 6472.44,2712.6 4755.91,2712.6 4673.23,2795.28 3019.68,2795.28 2925.2,2700.79 2224.41,2700.79 1952.76,2972.44 1555.12,2972.44
GND3 on Bottom Layer, Bottom (solid, pour order 14): 5181.1,1232.28 5181.1,1015.75 5019.69,1019.68 5019.69,826.77 6216.54,826.77 6216.54,1574.8 6161.42,1574.8 5405.51,1574.8 5283.46,1696.85 5070.87,1696.85 5031.5,1657.48 5031.5,1232.28
GND4 on Bottom Layer, Bottom (solid, pour order 12): 7047.24,1311.02 7047.24,1094.49 6885.83,1098.43 6885.83,905.51 8082.68,905.51 8082.68,1653.54 8027.56,1653.54 7271.65,1653.54 7149.61,1775.59 6937.01,1775.59 6897.64,1736.22 6897.64,1311.02
GND2 on Bottom Layer, Bottom (solid, pour order 10): 3287.4,1232.28 3287.4,1015.75 3125.98,1019.68 3125.98,826.77 4322.83,826.77 4322.83,1574.8 4267.72,1574.8 3511.81,1574.8 3389.76,1696.85 3177.17,1696.85 3137.8,1657.48 3137.8,1232.28
+5V on Bottom Layer, Bottom (solid, pour order 8): 2177.17,2425.2 2177.17,2228.35 2763.78,2228.35 2952.76,2039.37 3039.37,2039.37 3039.37,2574.8 2952.76,2574.8 2803.15,2425.2
GND1 on Bottom Layer, Bottom (solid, pour order 6): 1393.7,1311.02 1393.7,1094.49 1232.28,1098.43 1232.28,905.51 2429.13,905.51 2429.13,1688.98 2374.02,1688.98 2374.02,1653.54 1618.11,1653.54 1496.06,1775.59 1496.06,1877.95 1405.51,1968.5 1047.24,1968.5 1047.24,1775.59 1204.72,1775.59 1244.09,1736.22 1244.09,1311.02
NET00048 on Bottom Layer, Bottom (solid, pour order 4): 1574.8,2484.25 1456.69,2484.25 1456.69,2185.04 1574.8,2185.04

## Keep-outs
Keep-Out Layer, Board:
  lines w7.87: 275.59,326.77 8464.57,326.77 8464.57,3712.6 275.59,3712.6 275.59,326.77

## Other copper
Top Layer, Top:
  text "INSYTE" at 5312.38,2444.88 h43.4
  text "4Ch-3F-IO-V0" at 5052.17,2314.96 h43.4
Bottom Layer, Bottom:
  pour cut-out: 3051.18,2566.93 3051.18,2358.27 3992.13,2358.27 3992.13,2566.93
  pour cut-out: 3051.18,2196.85 3051.18,1988.19 3992.13,1988.19 3992.13,2196.85
  pour cut-out: 6145.67,1767.72 6145.67,1807.09 6066.93,1885.83 5842.52,1885.83 5842.52,1846.46 5921.26,1767.72
  pour cut-out: 4952.76,2196.85 4952.76,1988.19 5960.63,1988.19 5960.63,2196.85
  pour cut-out: 4255.91,1767.72 4255.91,1807.09 4177.17,1885.83 3952.76,1885.83 3952.76,1846.46 4031.5,1767.72
  pour cut-out: 1724.41,2484.25 1586.61,2484.25 1586.61,2188.98 1724.41,2188.98

## Silkscreen, mask and mechanical layers (free items; w line width, h text height)
Top Overlay, Top Silk:
  circle w7.87: c8267.72,901.57 r98.43
  circle w7.87: c472.44,901.57 r98.43
  circle w7.87: c8267.72,3137.8 r98.43
  circle w7.87: c472.44,3137.8 r98.43
  lines w7.87: 275.59,531.5 8464.57,531.5 ; 275.59,877.95 8464.57,877.95 ; 275.59,1311.02 8464.57,1311.02 ; 275.59,2019.68 8464.57,2019.68 ; 275.59,2728.35 8464.57,2728.35 ; 275.59,3161.42 8464.57,3161.42 ; 275.59,3507.87 8464.57,3507.87 ; 2440.94,877.95 6299.21,877.95 6299.21,3161.42 2440.94,3161.42 2440.94,877.95 ; 4370.08,314.96 4370.08,3724.41 4370.08,314.96
Mechanical 1, Top Assy:
  circle w7.87: c8267.72,901.57 r59.06
  circle w7.87: c472.44,901.57 r59.06
  circle w7.87: c8267.72,3137.8 r59.06
  circle w7.87: c472.44,3137.8 r59.06
  lines w9.84: 2440.94,1933.07 6299.21,1933.07 6299.21,1992.13 2440.94,1992.13 2440.94,1933.07 ; 2440.94,2562.99 4921.26,2562.99 4921.26,2622.05 2440.94,2622.05 2440.94,2562.99